# Altium PCB SART-CMSV1.0.PcbDoc
Units mm, origin at the board's own origin, x right, y up, seen from the top; angles counter-clockwise.
Board outline 40 x 40 mm, 4 copper layers (Top Layer, Layer 1, Layer 2, Bottom Layer), stack 1.566 mm thick; 61 components, 31 nets, 151 pads, 126 vias.
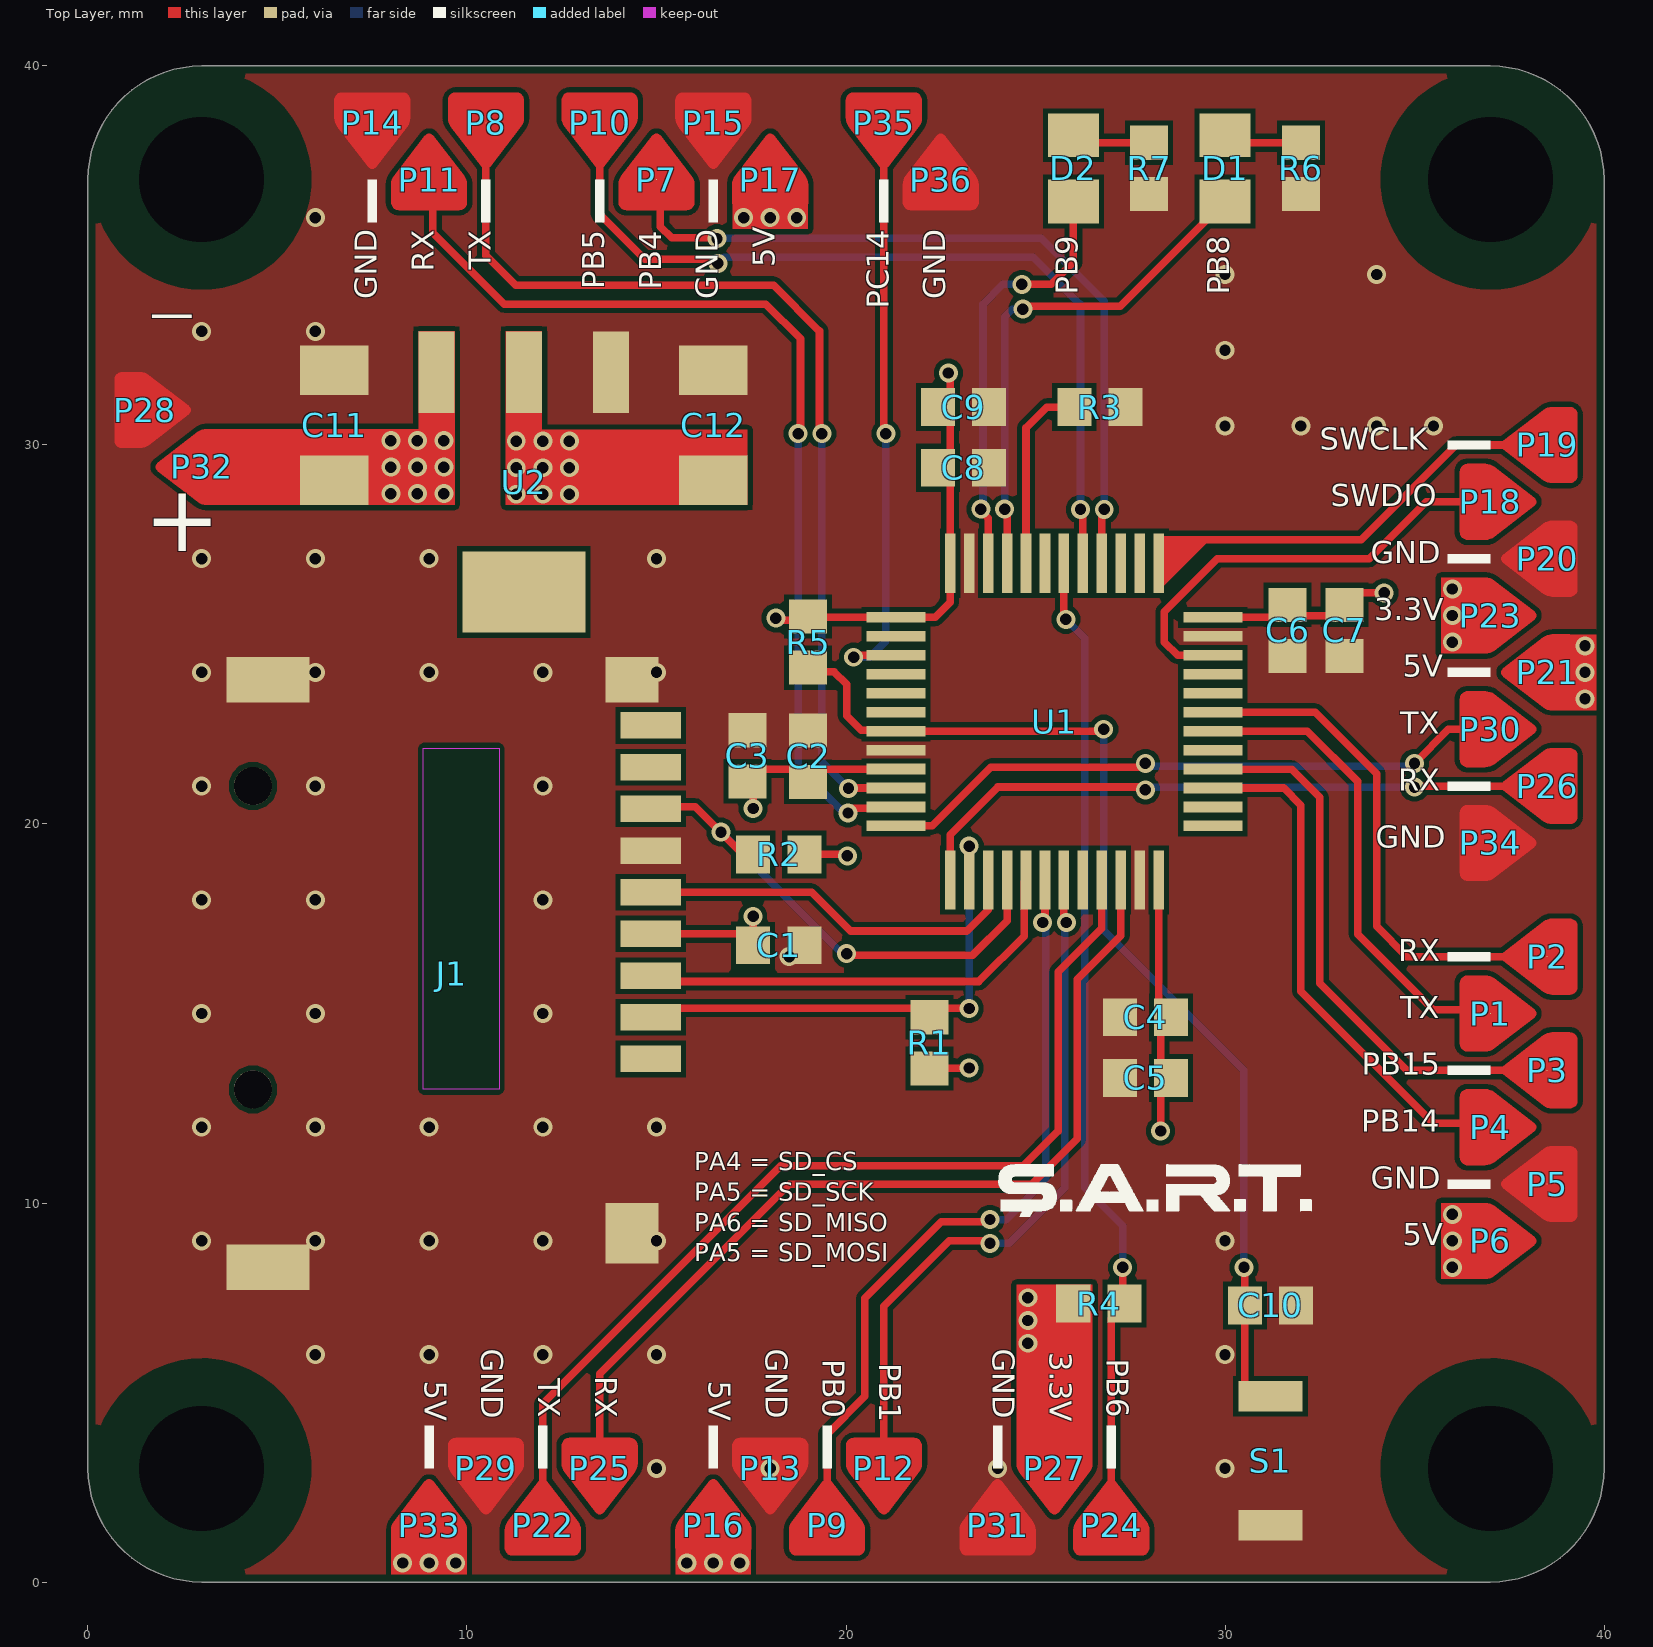
[diagram p0: Top Layer view]
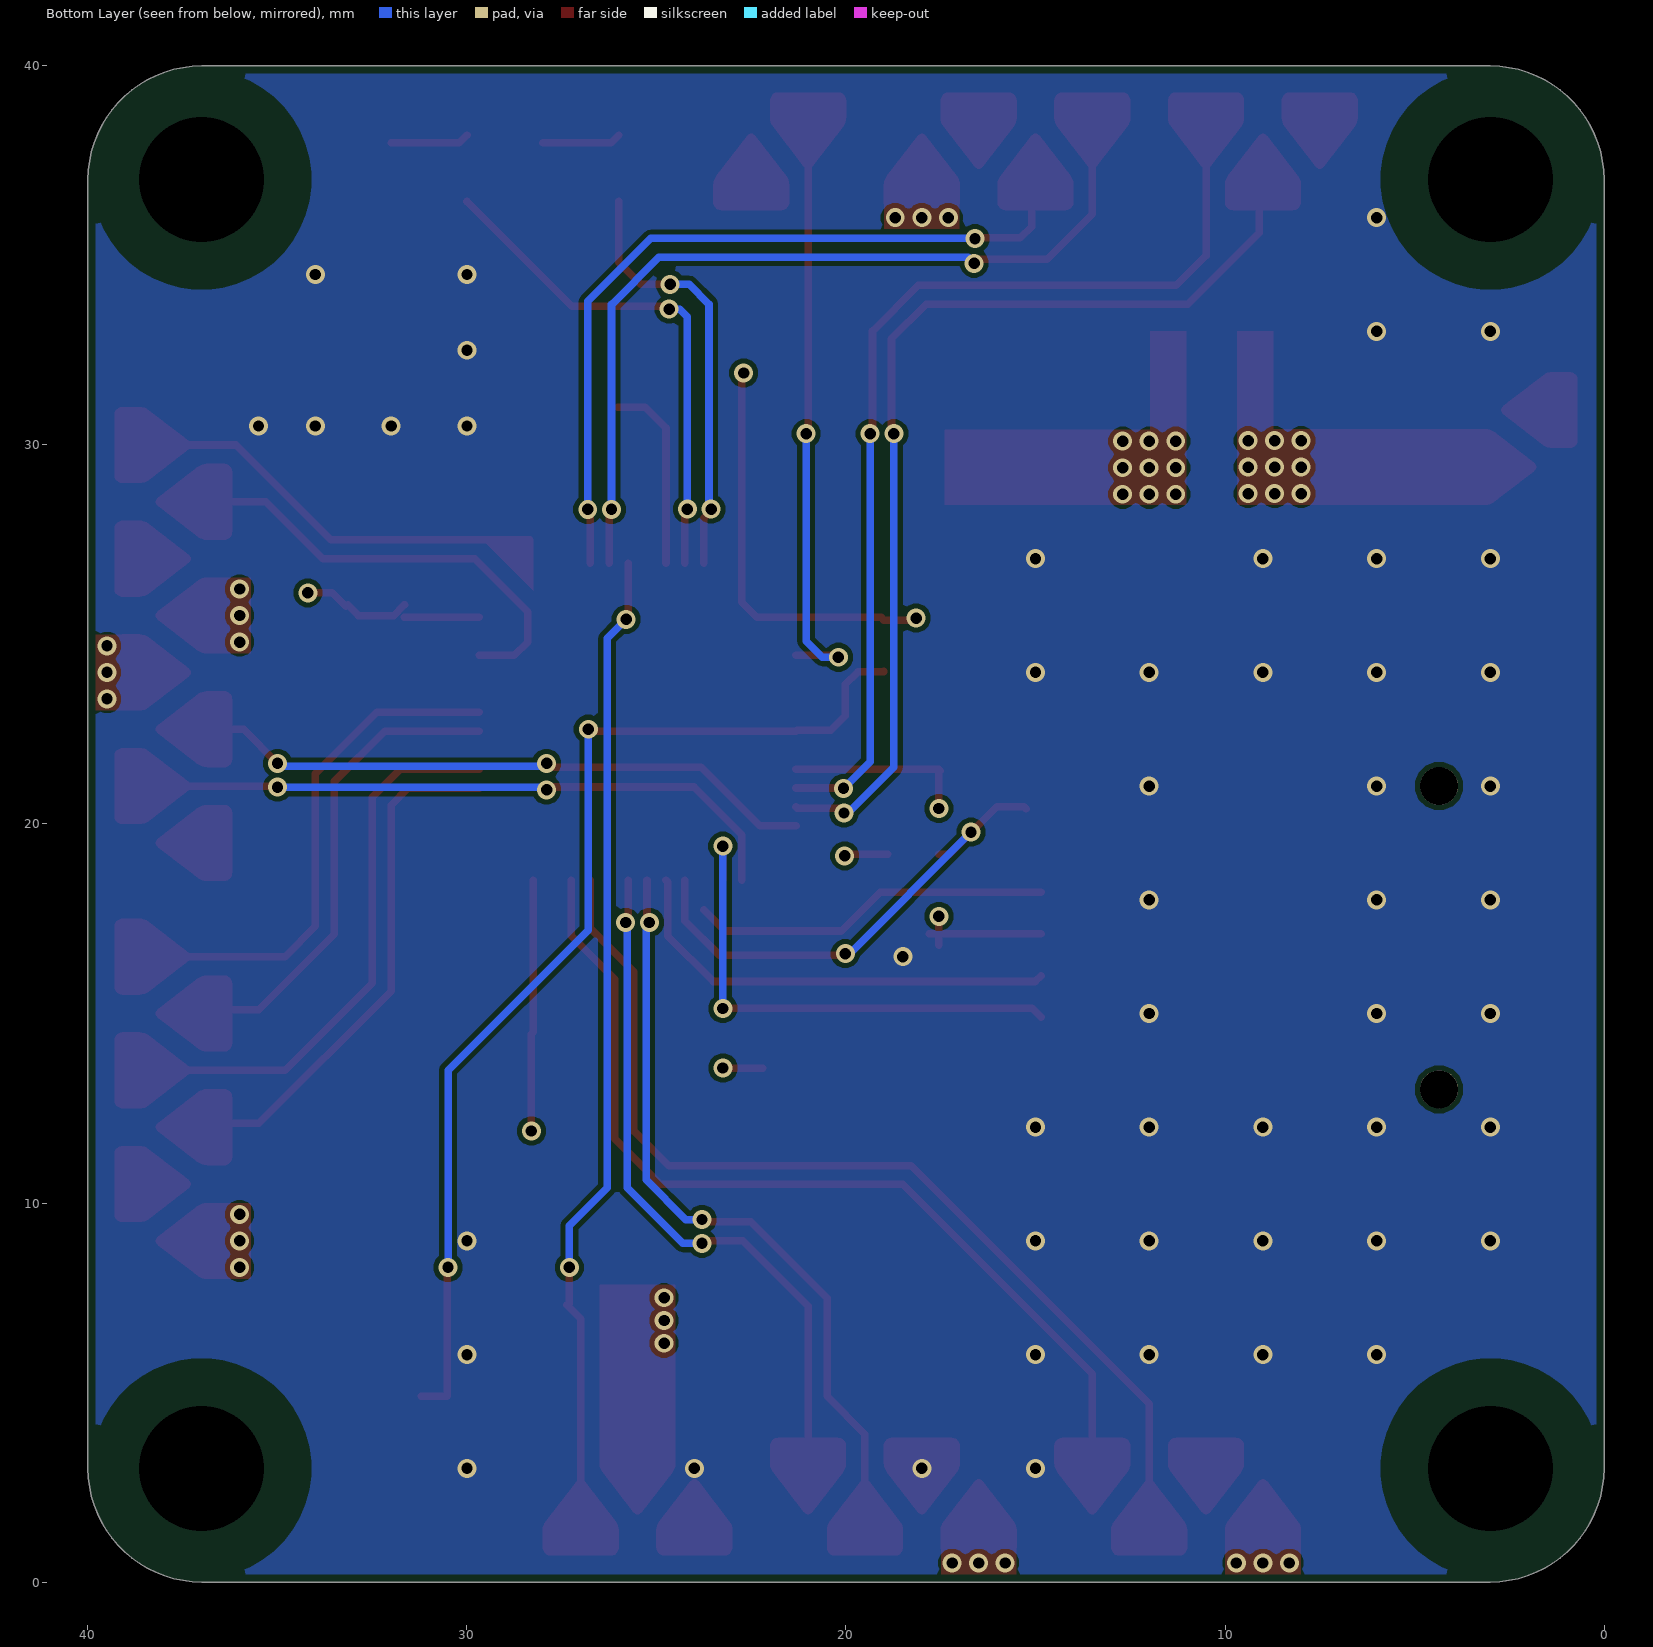
[diagram p1: Bottom Layer view, seen from below]
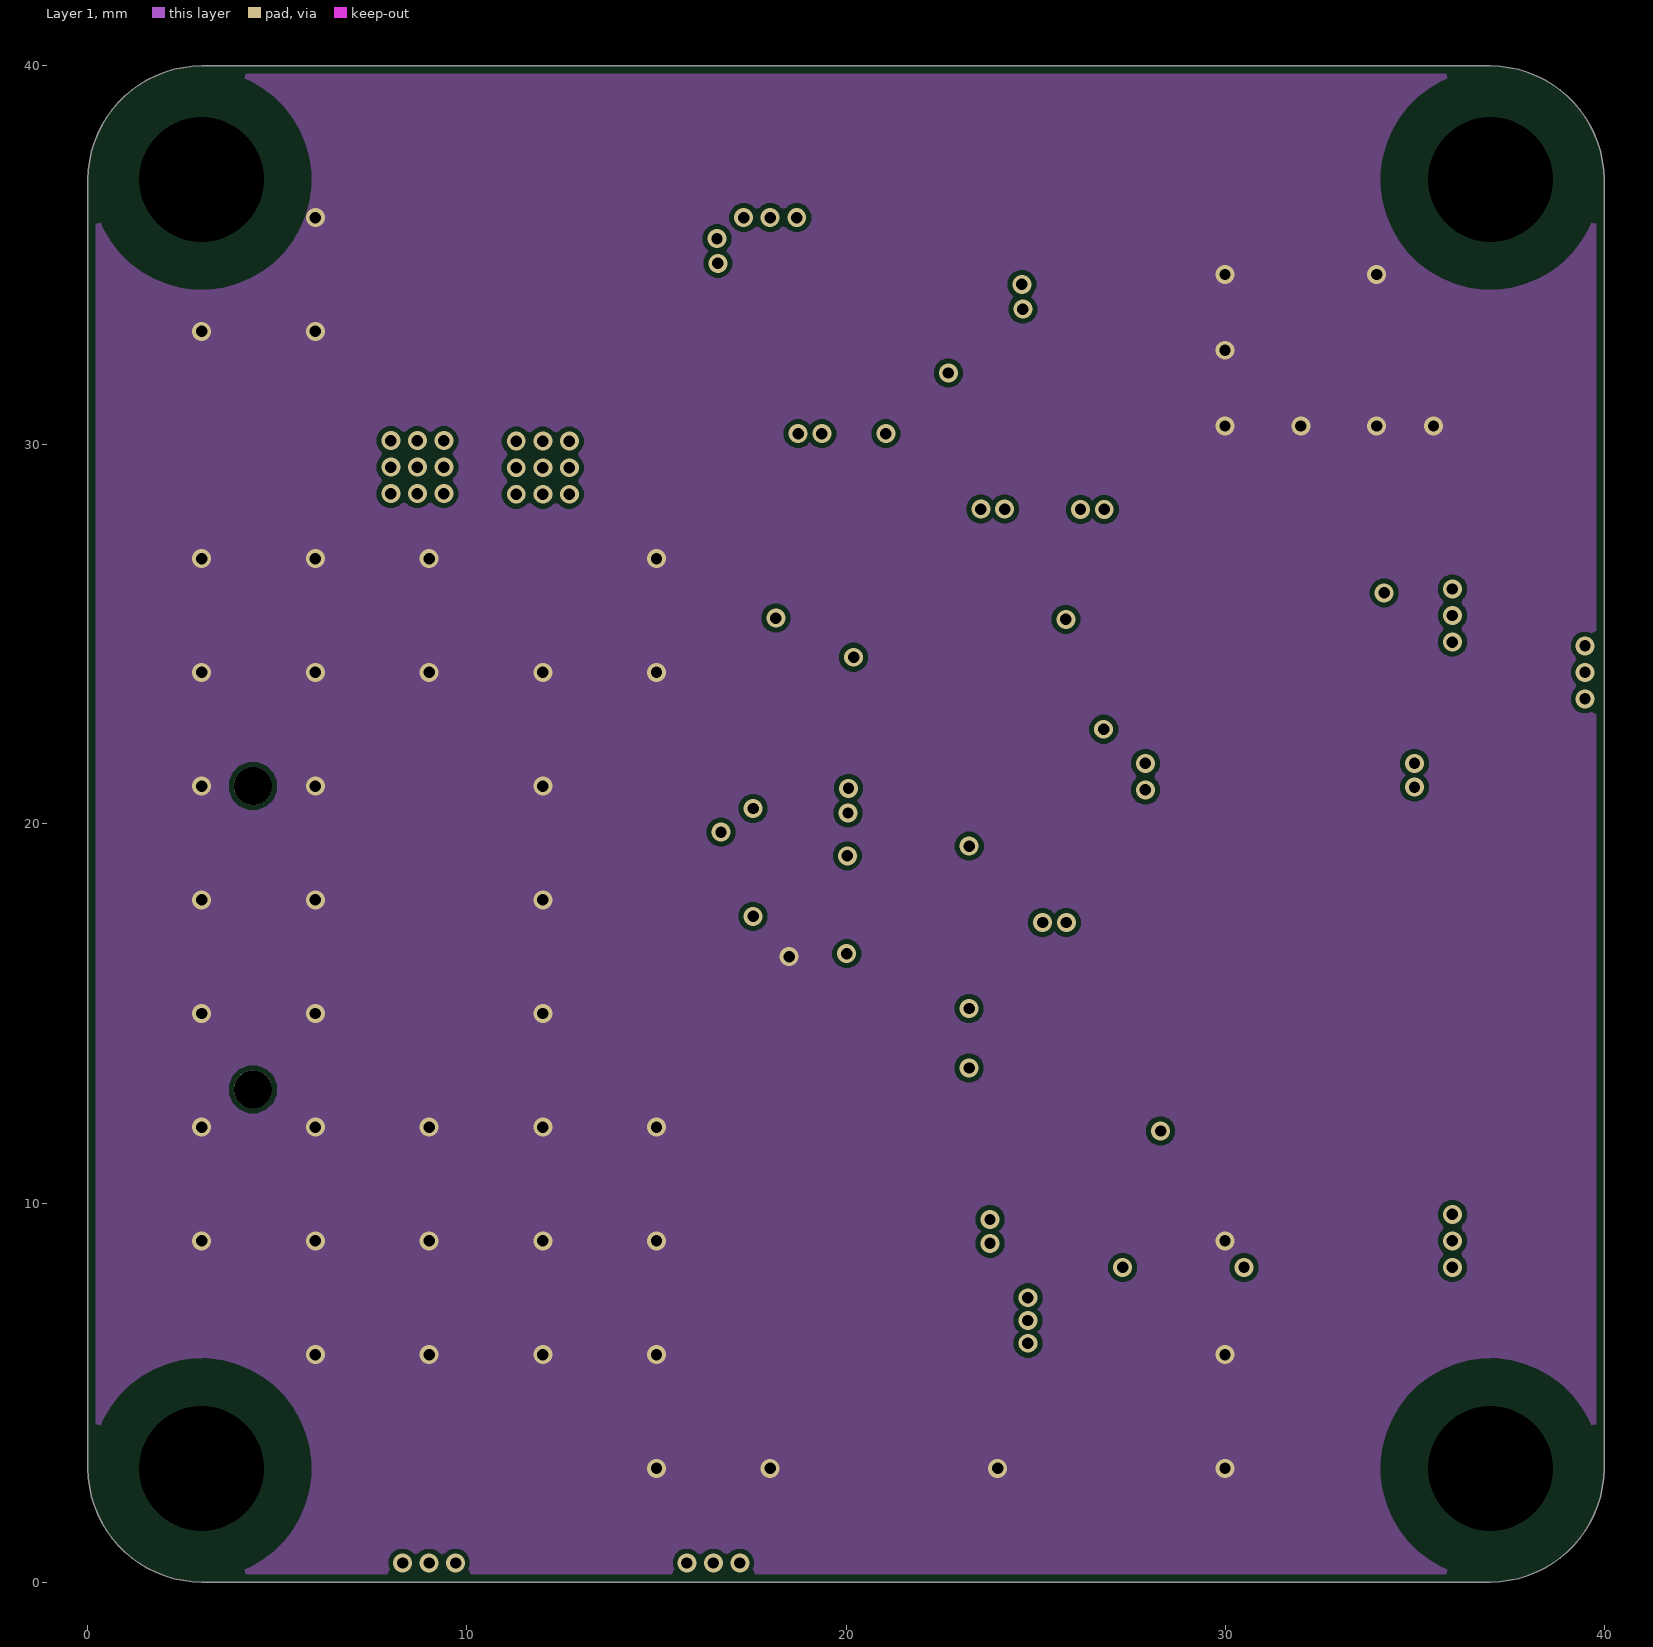
[diagram p2: Layer 1]
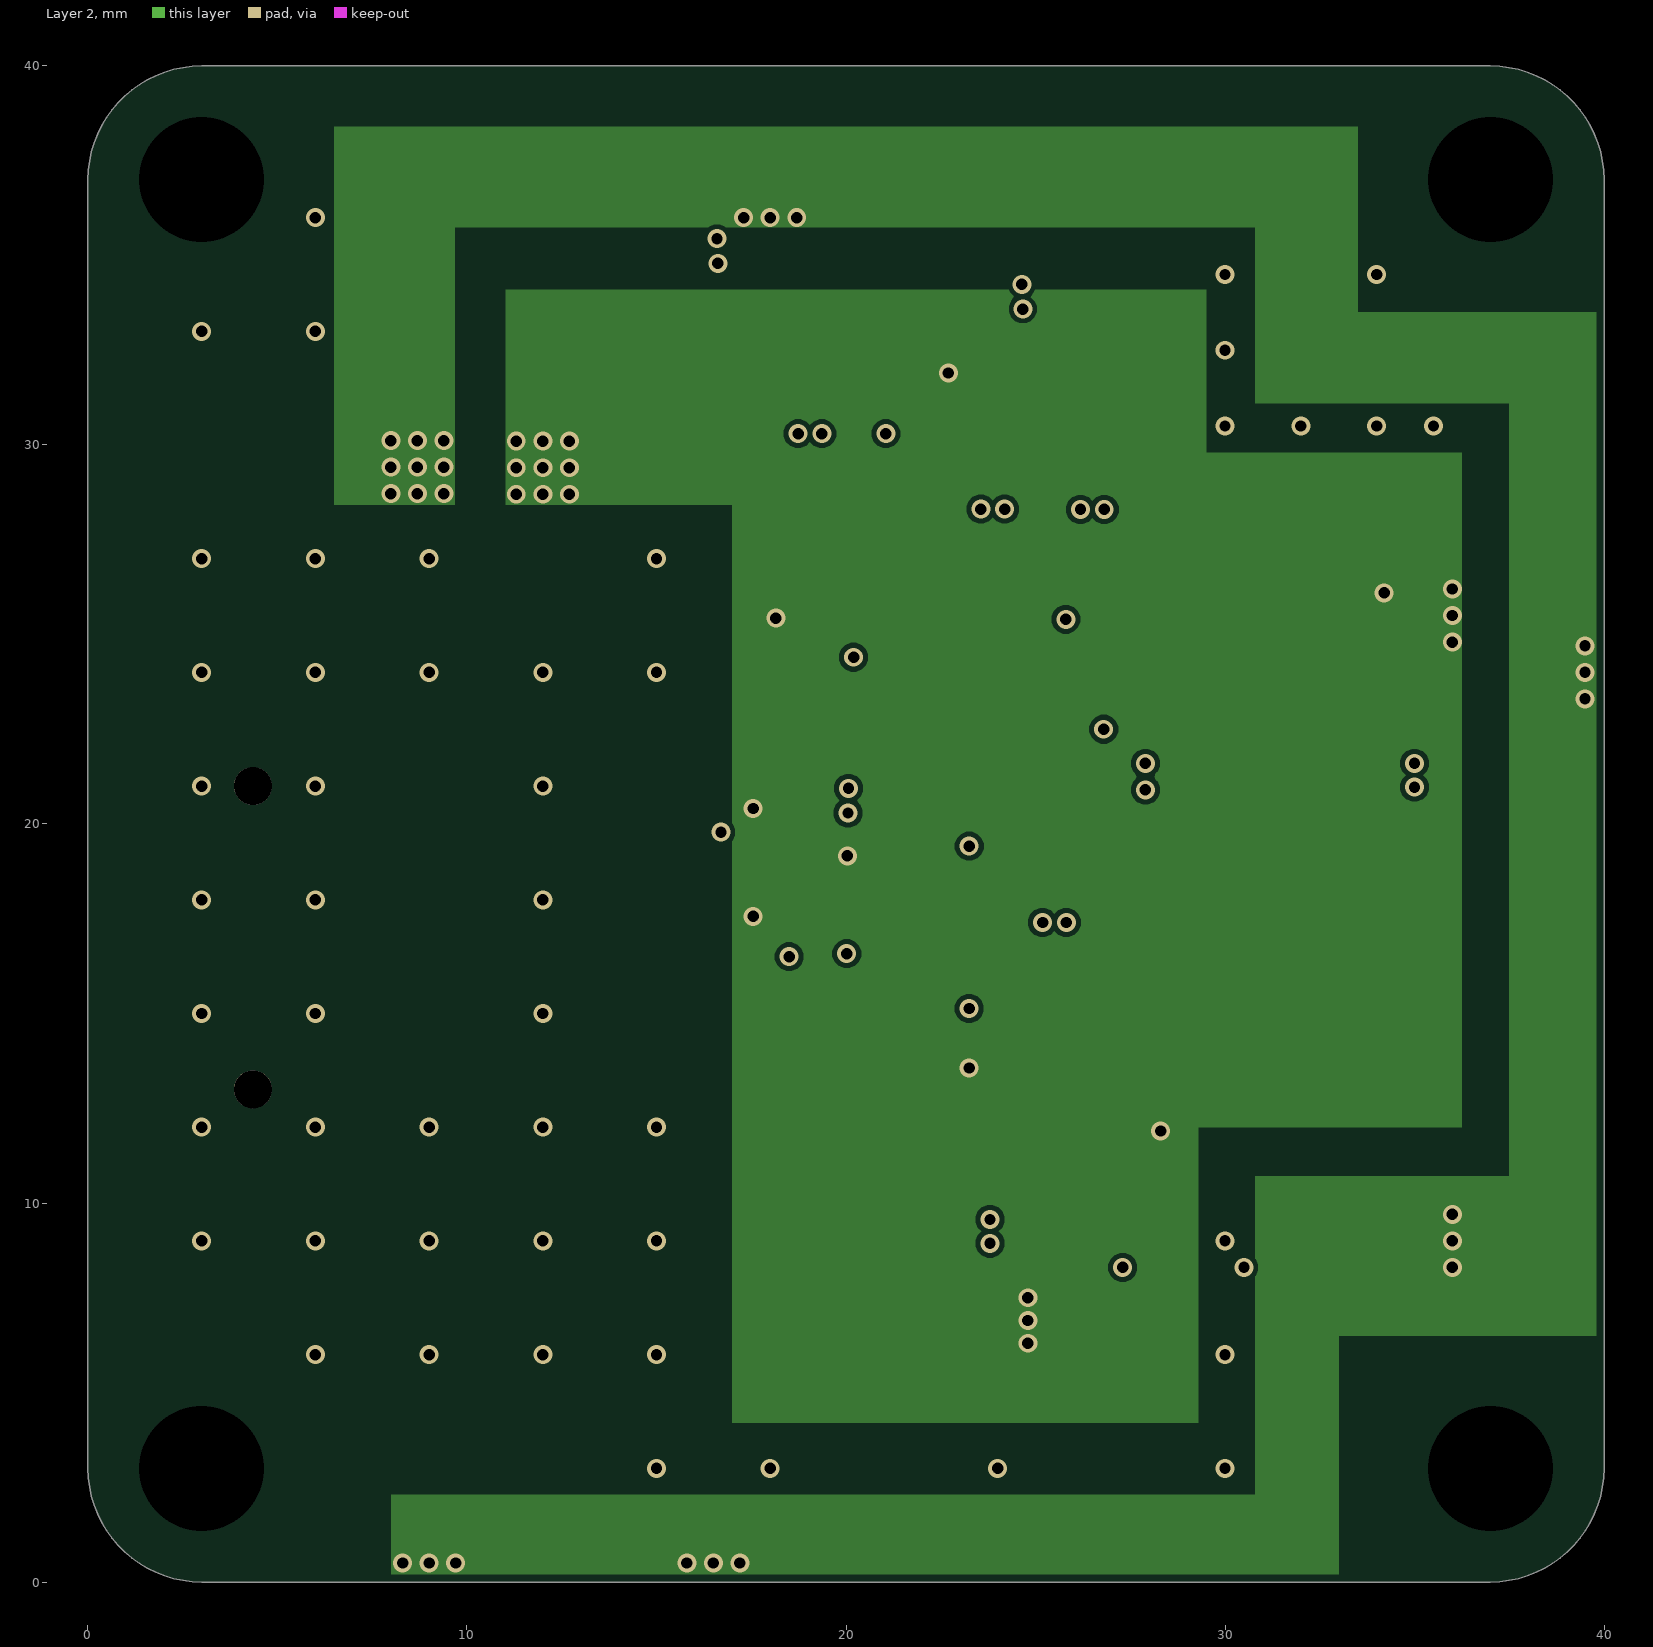
[diagram p3: Layer 2]

## Layer stack, top to bottom
Top Solder: solder mask 0.0305, Solder Resist, Dk 3.5
Top Layer: signal copper 0.035
Dielectric 2: prepreg 0.203, PP-006, Dk 4.1
Layer 1: signal copper 0.03
Dielectric 1: dielectric 1.03, FR-4, Dk 4.8
Layer 2: signal copper 0.03
Dielectric 3: prepreg 0.203, PP-006, Dk 4.1
Bottom Layer: signal copper 0.035
Bottom Solder: solder mask 0.0305, Solder Resist, Dk 3.5

## Board outline
3,0 37,0 ccw(c37,3) 40,3 40,37 ccw(c37,37) 37,40 3,40 ccw(c3,37) 0,37 0,3 ccw(c3,3)

## Design rules (kind name [scope] priority, off if disabled: settings)
BoardOutlineClearance [All] p1: gap=0.2 ignorepadtopadclearanceinfootprint=FALSE
Clearance [All] p1: gap=0.127 ignorepadtopadclearanceinfootprint=FALSE
ComponentClearance [All] p1 off: gap=0.254 collisioncheckmode=3 verticalgap=0 showdistances=FALSE checkcomponentboundary=TRUE
DiffPairsRouting [All] p1: maxlimit=0.3 minlimit=0.3 mostfreqgap=0.3 toplayer_minwidth=0.2 toplayer_maxwidth=0.2 toplayer_prefwidth=0.2 midlayer1_minwidth=0.2 midlayer1_maxwidth=0.2 midlayer1_prefwidth=0.2 midlayer2_minwidth=0.2 midlayer2_maxwidth=0.2 midlayer2_prefwidth=0.2 bottomlayer_minwidth=0.2 bottomlayer_maxwidth=0.2 bottomlayer_prefwidth=0.2 maxuncoupledlength=12.7
PlaneConnect [All] p1: planeconnectstyle=Direct reliefexpansion=0.508 reliefentries=4 reliefconductorwidth=0.254 reliefairgap=0.254
PolygonConnect [All] p1: connectstyle=Direct reliefconductorwidth=0.254 reliefentries=4 polygonreliefangle="90 Angle" airgapwidth=0.254
RoutingVias [All] p1: holewidth=0.3 width=0.5 viastyle="Through Hole" minholewidth=0.3 minwidth=0.5 maxholewidth=0.711 maxwidth=1.27
ShortCircuit [InComponent('*1')or InComponent('*2') or InComponent('*3') vs InComponent('*1')or InComponent('*2') or InComponent('*3')] p1: allowed=TRUE
SilkToSilkClearance [All] p1 off: silktosilkclearance=0.254
SolderMaskExpansion [All] p1: expansion=0.035 istentingtop=FALSE
Width [All] p1: maxlimit=2 minlimit=0.127 preferedwidth=0.2
25 further rules are at their usual default settings.

## Components (designator, comment, footprint, x,y, rotation, side; value= is the part's Value field where it differs from the comment)
C1 "0603, 1uF" "CAP 0603_1608" 18.225,16.8 r180 top
C2 "0603, 0.1uF" "CAP 0603_1608" 19,21.787 r270 top
C3 "0603, 1uF" "CAP 0603_1608" 17.4,21.8 r270 top
C4 "0603, 0.1uF" "CAP 0603_1608" 27.9,14.9 r0 top
C5 "0603, 1uF" "CAP 0603_1608" 27.9,13.3 r0 top
C6 "0603, 0.1uF" "CAP 0603_1608" 31.65,25.108 r90 top
C7 "0603, 1uF" "CAP 0603_1608" 33.15,25.108 r90 top
C8 "0603, 0.1uF" "CAP 0603_1608" 23.1,29.4 r180 top
C9 "0603, 1uF" "CAP 0603_1608" 23.1,31 r180 top
C10 "0603, 0.1uF" "CAP 0603_1608" 31.2,7.3 r180 top
C11 "1206, 10uF" "CAP 1206_3216" 6.5,30.521 r270 top
C12 "1206, 10uF" "CAP 1206_3216" 16.5,30.521 r270 top
D1 "0805 LED Yellow" "LED 0805_2012 YELLOW" 30,37.3 r90 top
D2 "0805 LED Red" "LED 0805_2012 RED" 26,37.3 r90 top
J1 "L-KLS1-TF-003-H1.85-R" L-KLS1-TF-003-H1.85-R 8,16.05 r270 top
P1 "Pad1" PAD 37,15 r270 top
P2 "Pad0" PAD 38.5,16.5 r90 top
P3 "Pad1" PAD 38.5,13.5 r90 top
P4 "Pad0" PAD 37,12 r270 top
P5 "Pad1" PAD 38.5,10.5 r90 top
P6 "Pad0" PAD 37,9 r270 top
P7 "Pad1" PAD 15,37 r0 top
P8 "Pad1" PAD 10.5,38.5 r180 top
P9 "Pad1" PAD 19.5,1.5 r0 top
P10 "Pad0" PAD 13.5,38.5 r180 top
P11 "Pad0" PAD 9,37 r0 top
P12 "Pad0" PAD 21,3 r180 top
P13 "Pad1" PAD 18,3 r180 top
P14 "Pad1" PAD 7.5,38.5 r180 top
P15 "Pad1" PAD 16.5,38.5 r180 top
P16 "Pad0" PAD 16.5,1.5 r0 top
P17 "Pad0" PAD 18,37 r0 top
P18 "Pad1" PAD 37,28.5 r270 top
P19 "Pad0" PAD 38.5,30 r90 top
P20 "Pad1" PAD 38.5,27 r90 top
P21 "Pad0" PAD 38.5,24 r90 top
P22 "Pad1" PAD 12,1.5 r0 top
P23 "Pad1" PAD 37,25.5 r270 top
P24 "Pad1" PAD 27,1.5 r0 top
P25 "Pad0" PAD 13.5,3 r180 top
P26 "Pad0" PAD 38.5,21 r90 top
P27 "Pad0" PAD 25.5,3 r180 top
P28 "Pad1" PAD 1.5,30.921 r270 top
P29 "Pad1" PAD 10.5,3 r180 top
P30 "Pad1" PAD 37,22.5 r270 top
P31 "Pad1" PAD 24,1.5 r0 top
P32 "Pad0" PAD 3,29.421 r90 top
P33 "Pad0" PAD 9,1.5 r0 top
P34 "Pad0" PAD 37,19.5 r270 top
P35 "Pad1" PAD 21,38.5 r180 top
P36 "Pad0" PAD 22.5,37 r0 top
R1 "0603, 10K" "RES 0603_1608" 22.2,14.225 r90 top
R2 "0603, 10K" "RES 0603_1608" 18.225,19.2 r180 top
R3 "0603, 10K" "RES 0603_1608" 26.7,31 r0 top
R4 "0603, 4.7K" "RES 0603_1608" 26.671,7.346 r0 top
R5 "0603, 10K" "RES 0603_1608" 19,24.8 r270 top
R6 "0603, 2.2K" "RES 0603_1608" 32,37.3 r90 top
R7 "0603, 2.2K" "RES 0603_1608" 28,37.3 r90 top
S1 "B3U-1000P" B3U-1000P 31.2,3.2 r270 top
U1 "STM32F072C8T6" STM32F072C8T6 25.5,22.7 r0 top
U2 "TLV1117-33IDCYR" SOT230P700X180-4N 11.5,29.021 r270 top

## Footprints (in the part's own frame and the unit in brackets; to place one, negate y for a bottom-side part, rotate by r counter-clockwise, add the part's x,y. Pads: shape width x height; smd on the part's side, far side on the other; paste and mask are expansions set on the pad)
B3U-1000P [mm]
  rect 0.8x1.7 smd: 1(-1.7,0) 2(1.7,0)
  body extent -2,-1.25 2,1.25, height 1.75
"CAP 0603_1608" [mm] "Chip Capacitor, 2-Leads, Body 1.60x0.80mm, IPC Medium Density"
  rect 0.9x1 smd: 1(-0.675,0) 2(0.675,0)
  body extent -0.8,-0.41 0.8,0.41, height 0.82
"CAP 1206_3216" [mm] "Chip Capacitor, 2-Leads, Body 3.25x1.60mm, IPC Medium Density"
  rect 1.3x1.8 smd: 1(-1.45,0) 2(1.45,0)
  body extent -1.6,-0.81 1.6,0.81, height 1.62
L-KLS1-TF-003-H1.85-R [mm]
  rect 0.7x1.6 smd: 1(2.25,6.85) 2(1.15,6.85) 3(0.05,6.85) 4(-1.05,6.85) 5(-2.15,6.85) 6(-3.25,6.85) 7(-4.35,6.85) 8(-5.45,6.85) 9(-6.55,6.85)
  rect 1.2x1.4 smd: 6(-7.75,6.35)
  rect 1.2x2.2 smd: 6(-7.75,-3.25) 6(7.75,-3.25)
  rect 1.6x1.4 smd: 6(6.85,6.35)
  round 1 hole 1 unplated: ""(-4.95,-3.65) ""(3.05,-3.65)
  Top Layer keep-out region: -5.95,2.85 3.05,2.85 3.05,0.85 -5.95,0.85
  body extent -8.05,-9.85 8.05,7.35, height 1.9
"LED 0805_2012 RED" [mm] "Chip Diode, 2-Leads, Body 2.00x1.25mm, IPC Medium Density"
  rect 1.15x1.35 smd: 1(-0.875,0) 2(0.875,0)
  body extent -1,-0.63 1,0.63, height 0.91
"LED 0805_2012 YELLOW" [mm] "Chip Diode, 2-Leads, Body 2.00x1.25mm, IPC Medium Density"
  rect 1.15x1.35 smd: 1(-0.875,0) 2(0.875,0)
  body extent -1,-0.63 1,0.63, height 0.91
PAD [mil]
  round 1 smd: 1(0,0)
  Top Layer region: -39.37,-23.78 -39.37,-4.87 -38.61,-0.26 -36.4,3.86 -36.4,3.86 -4.29,45.6 -2.39,47.16 0,47.71 2.39,47.16 4.29,45.6 4.29,45.6 36.32,3.97 38.59,-0.27 39.37,-5.01 39.37,-5.01 39.37,-23.64 38.77,-26.65 37.07,-29.2 34.52,-30.9 31.52,-31.5 31.52,-31.5 -31.66,-31.5 -34.61,-30.91 -37.11,-29.24 -38.78,-26.73 -39.37,-23.78
"RES 0603_1608" [mm] "Chip Resistor, 2-Leads, Body 1.60x0.80mm, IPC Medium Density"
  rect 0.9x1 smd: 1(-0.675,0) 2(0.675,0)
  body extent -0.8,-0.4 0.8,0.4, height 0.45
SOT230P700X180-4N [mm]
  rect 2.15x0.95 smd: 1(-2.9,2.3) 2(-2.9,0) 3(-2.9,-2.3)
  rect 2.15x3.25 smd: 2(2.9,0)
  body extent -3.5,-3.25 3.5,3.25, height 1.81
STM32F072C8T6 [mm]
  rect 1.56x0.28 smd: 1(-4.18,2.75) 2(-4.18,2.25) 3(-4.18,1.75) 4(-4.18,1.25) 5(-4.18,0.75) 6(-4.18,0.25) 7(-4.18,-0.25) 8(-4.18,-0.75) 9(-4.18,-1.25) 10(-4.18,-1.75) 11(-4.18,-2.25) 12(-4.18,-2.75) 25(4.18,-2.75) 26(4.18,-2.25) 27(4.18,-1.75) 28(4.18,-1.25) 29(4.18,-0.75) 30(4.18,-0.25) 31(4.18,0.25) 32(4.18,0.75) 33(4.18,1.25) 34(4.18,1.75) 35(4.18,2.25) 36(4.18,2.75)
  rect 0.28x1.56 smd: 13(-2.75,-4.18) 14(-2.25,-4.18) 15(-1.75,-4.18) 16(-1.25,-4.18) 17(-0.75,-4.18) 18(-0.25,-4.18) 19(0.25,-4.18) 20(0.75,-4.18) 21(1.25,-4.18) 22(1.75,-4.18) 23(2.25,-4.18) 24(2.75,-4.18) 37(2.75,4.18) 38(2.25,4.18) 39(1.75,4.18) 40(1.25,4.18) 41(0.75,4.18) 42(0.25,4.18) 43(-0.25,4.18) 44(-0.75,4.18) 45(-1.25,4.18) 46(-1.75,4.18) 47(-2.25,4.18) 48(-2.75,4.18)
  body extent -4.5,-4.5 4.5,4.5, height 1.61

## Part data
C1 C2 C3 C4 C5 C6 C7 C8 C9 C10: library part "0603 Kapasitör"
C11 C12: library part "1206 Kapasitör"
R1 R2 R3 R4 R5 R6 R7: library part "0603 Direnç"

## Free pads (board coordinates)
  round 0 hole 3.3 unplated mask+1.25: 55(3,3) 55(3,37) 55(37,3) 55(37,37)

## Via types
v1: diameter 0.5, hole 0.3, Top Layer to Bottom Layer, tented both sides, 126 vias

## Nets (pads, with @x,y where several pads share a name; then routed paths per layer and width w, separated by ;. In a path a pad name is that pad's centre, name@x,y a point inside that pad or via, vN(x,y) a via of type N, cw(c..) or ccw(c..) an arc to the next point about the centre after c; other vN are vias at no path point)
3.3V: C1.2 C2.2 C3.2 C4.2 C5.2 C6.2 C7.2 C8.2 C9.2 C12.2 J1.4 P23.1 P27.1 R1.1 R2.1 R4.1 R5.1 U1.1 U1.9 U1.24 U1.36 U1.48 U2.2@11.5,31.921 | length 33.2
  Top Layer w0.2: J1.4 C1.2@17.8,17.1 ; v1(17.548,17.564) C1.2 C1.2 ; v1(17.55,20.408) 17.55,21.366 17.508,21.408 17.55,21.45 U1.9 ; v1(18.15,25.433) 18.208,25.375 19,25.375 19.075,25.45 U1.1 22.35,25.45 22.75,25.85 U1.48 22.75,31.85 v1(22.7,31.9) ; R2.1 19.994,19.2 v1(20.034,19.16) ; R1.1 23.235,13.55 v1(23.248,13.563) ; U1.24 28.25,15.792 28.25,14.5 28.3,14.45 v1(28.3,11.9) ; U1.36 C6.2@31.65,25.45 ; C6.2 31.938,25.495 32.862,25.495 C7.2 ; C7.2@33.2,25.741 33.559,26.1 v1(34.2,26.1)
  other v1: 24.8,6.3 24.8,6.9 24.8,7.5 36,24.8 36,25.5 36,26.2 11.3,28.7 12,28.7 12.7,28.7 11.3,29.4 12,29.4 12.7,29.4 11.3,30.1 12,30.1 12.7,30.1
5V: C11.2 P6.1 P16.1 P17.1 P21.1 P32.1 P33.1 U2.3
  other v1: 8.3,0.5 9,0.5 9.7,0.5 15.8,0.5 16.5,0.5 17.2,0.5 36,8.3 36,9 36,9.7 39.5,23.3 39.5,24 39.5,24.7 7.989,28.715 8.689,28.715 9.389,28.715 7.989,29.415 8.689,29.415 9.389,29.415 7.989,30.115 8.689,30.115 9.389,30.115 17.3,36 18,36 18.7,36
ADC_IN8: P9.1 U1.18 | length 20.4
  Top Layer w0.2: P9.1 19.5,3.9 20.5,4.9 20.5,7.481 22.519,9.5 23.737,9.5 v1(23.8,9.564) ; v1(25.187,17.4) 25.25,17.464 U1.18
  Bottom Layer w0.2: v1(23.8,9.564) 24.225,9.564 25.274,10.613 25.274,17.313 v1(25.187,17.4)
ADC_IN9: P12.1 U1.19 | length 18.6
  Top Layer w0.2: P12.1 21,5.8 21,7.274 22.726,9 23.737,9 v1(23.8,8.937) ; U1.19 25.75,17.464 v1(25.813,17.4)
  Bottom Layer w0.2: v1(23.8,8.937) 24.305,8.937 25.774,10.406 25.774,17.36 v1(25.813,17.4)
GND: C1.1 C2.1 C3.1 C4.1 C5.1 C6.1 C7.1 C8.1 C9.1 C10.1 C11.1 C12.1 J1.6 P5.1 P13.1 P14.1 P15.1 P20.1 P28.1 P29.1 P31.1 P34.1 P36.1 R3.2 R6.1 R7.1 S1.2 U1.8 U1.23 U1.35 U1.47 U2.1
  other v1: 15,3 18,3 24,3 30,3 6,6 9,6 12,6 15,6 30,6 3,9 6,9 9,9 12,9 15,9 30,9 3,12 6,12 9,12 12,12 15,12 3,15 6,15 12,15 18.5,16.5 3,18 6,18 12,18 3,21 6,21 12,21 3,24 6,24 9,24 12,24 15,24 3,27 6,27 9,27 15,27 30,30.5 32,30.5 34,30.5 35.5,30.5 30,32.5 3,33 6,33 30,34.5 34,34.5 6,36
LoRa_M0: P3.1 U1.28 | length 15
  Top Layer w0.2: U1.28 31.757,21.45 32.5,20.707 32.5,15.8 34.8,13.5 P3.1
LoRa_M1: P4.1 U1.27 | length 13.9
  Top Layer w0.2: U1.27 31.55,20.95 32,20.5 32,15.593 35.493,12.1 36.9,12.1 P4.1
LoRa_RX: P2.1 U1.31 | length 13.9
  Top Layer w0.2: U1.31 32.378,22.95 34,21.328 34,17.3 34.8,16.5 P2.1
LoRa_TX: P1.1 U1.30 | length 12.8
  Top Layer w0.2: U1.30 32.171,22.45 33.5,21.121 33.5,17.093 35.493,15.1 36.9,15.1 P1.1
NetC10_2: C10.2 R5.2 S1.1 U1.7 | length 28.8
  Top Layer w0.2: R5.2@19,24.025 19.008,24.017 19.683,24.017 20.018,23.682 20.018,22.855 20.4,22.474 21.296,22.474 U1.7 26.75,22.45 v1(26.8,22.5) ; v1(30.5,8.3) 30.525,8.275 30.525,6.5 30.525,4.9 S1.1
  Bottom Layer w0.2: v1(26.8,22.5) 26.8,17.2 30.5,13.5 v1(30.5,8.3)
NetD1_2: D1.2 R6.2 | length 2.1
  Top Layer w0.2: D1.2 30.2,37.975 R6.2
NetD2_2: D2.2 R7.2 | length 2.1
  Top Layer w0.2: D2.2 26.2,37.975 R7.2
NetR3_1: R3.1 U1.44 | length 5.1
  Top Layer w0.2: U1.44 24.75,27.762 24.75,28.238 24.75,30.45 25.3,31 R3.1
Nextion_RX: P25.1 U1.22 | length 25
  Top Layer w0.2: P25.1 13.5,4.106 13.5,5.493 18.507,10.5 24.907,10.5 26.1,11.693 26.1,15.9 27.25,17.05 U1.22
Nextion_TX: P22.1 U1.21 | length 26.9
  Top Layer w0.2: P22.1 12,4.7 18.282,10.982 24.682,10.982 25.6,11.9 25.6,16.106 26.75,17.256 U1.21
PB4: P7.1 U1.40 | length 20.8
  Top Layer w0.2: P7.1 15.1,36.9 15.1,35.763 15.398,35.465 16.574,35.465 v1(16.596,35.444) ; U1.40 26.75,28.236 v1(26.813,28.3)
  Bottom Layer w0.2: v1(16.596,35.444) 16.607,35.454 25.146,35.454 26.813,33.787 v1(26.813,28.3)
PB5: P10.1 U1.41 | length 23.1
  Top Layer w0.2: P10.1 13.5,36.093 14.687,34.906 16.507,34.906 v1(16.62,34.793) ; v1(26.187,28.3) 26.25,28.236 U1.41
  Bottom Layer w0.2: v1(16.62,34.793) 16.781,34.954 24.938,34.954 26.187,33.706 v1(26.187,28.3)
PB6: P24.1 R4.2 U1.42 | length 26.2
  Top Layer w0.2: U1.42 25.75,25.45 v1(25.8,25.4) ; P24.1 27,5 27,6.95 R4.2@27.371,7.321 ; R4.2@27.3,7.346 v1@27.3,8.254 ; v1(27.3,8.3) v1@27.346,8.254
  Bottom Layer w0.2: v1(25.8,25.4) 26.3,24.9 26.3,10.4 27.3,9.4 v1(27.3,8.3)
PB8: D1.1 U1.45 | length 13.6
  Top Layer w0.2: v1(24.186,28.308) 24.25,28.245 U1.45 ; v1(24.667,33.585) 24.74,33.657 27.232,33.657 D1.1
  Bottom Layer w0.2: v1(24.186,28.308) 24.186,33.386 24.385,33.585 v1(24.667,33.585)
PB9: D2.1 U1.46 | length 11.4
  Top Layer w0.2: v1(23.559,28.308) 23.559,28.252 23.75,28.061 U1.46 ; v1(24.641,34.238) 25.42,34.238 26,34.819 D2.1
  Bottom Layer w0.2: v1(23.559,28.308) 23.615,28.364 23.615,33.715 24.138,34.238 v1(24.641,34.238)
PC14: P35.1 U1.3 | length 16
  Top Layer w0.2: v1(20.2,24.4) 20.25,24.45 U1.3 ; P35.1 21,30.35 v1(21.05,30.3)
  Bottom Layer w0.2: v1(20.2,24.4) 20.63,24.4 21.05,24.82 v1(21.05,30.3) v1@21.05,30.4
SD_CS: J1.2 R1.2 U1.14 | length 13.7
  Top Layer w0.2: J1.2 15.091,15.141 22.2,15.141 22.208,15.133 v1(23.249,15.133) ; U1.14 23.25,19.35 23.3,19.4 23.267,19.4 v1(23.251,19.416)
  Bottom Layer w0.2: v1(23.249,15.133) 23.251,15.136 v1(23.251,19.416)
SD_MISO: J1.7 R2.2 U1.16 | length 13.2
  Top Layer w0.2: J1.7@15.25,20.4 15.302,20.452 16.022,20.452 17.274,19.2 R2.2 ; v1@16.697,19.778 v1(16.702,19.784) ; v1(20.019,16.578) 20.059,16.538 23.338,16.538 24.25,17.45 U1.16
  Bottom Layer w0.2: v1(16.702,19.784) 16.702,19.781 19.945,16.538 19.979,16.538 v1(20.019,16.578)
SD_MOSI: J1.3 U1.17 | length 11.9
  Top Layer w0.2: J1.3 15.005,15.845 23.507,15.845 24.7,17.037 24.7,18.47 U1.17
SD_SCK: J1.5 U1.15 | length 9.6
  Top Layer w0.2: J1.5 19.1,18.2 20.124,17.176 23.186,17.176 23.75,17.74
Serial_RX: P26.1 U1.13 | length 17.5
  Top Layer w0.2: U1.13 22.75,19.719 24.007,20.976 27.824,20.976 v1(27.9,20.9) ; v1(35,20.973) 35.027,21 37.394,21 P26.1
  Bottom Layer w0.2: v1(27.9,20.9) 27.966,20.966 v1@34.993,20.966
Serial_TX: P30.1 U1.12 | length 16.8
  Top Layer w0.2: U1.12 22.274,19.95 23.825,21.501 27.801,21.501 v1(27.9,21.6) ; v1(35,21.6) 35,21.606 35.894,22.5 P30.1
  Bottom Layer w0.2: v1(27.9,21.6) 27.98,21.52 34.92,21.52 v1(35,21.6)
SWCLK: P19.1 U1.37 | length 11.2
  Top Layer w0.2: U1.37@28.349,27.5 33.6,27.5 36.1,30 P19.1
SWDIO: P18.1 U1.34 | length 12
  Top Layer w0.2: U1.34 28.75,24.45 28.4,24.8 28.4,25.6 29.8,27 33.807,27 35.307,28.5 P18.1
VESC_RX: P11.1 U1.11 | length 26.8
  Top Layer w0.2: P11.1 9.1,36.9 9.1,35.6 10.983,33.717 17.883,33.717 18.8,32.8 18.8,30.364 v1(18.737,30.3) ; v1(20.052,20.29) 20.052,20.309 20.162,20.42 21.29,20.42 U1.11
  Bottom Layer w0.2: v1(18.737,30.3) 18.737,21.495 19.941,20.29 v1(20.052,20.29)
VESC_TX: P8.1 U1.10 | length 26.8
  Top Layer w0.2: P8.1 10.5,35 11.283,34.217 18.09,34.217 19.3,33.007 19.3,30.364 v1(19.364,30.3) ; v1(20.066,20.942) 20.074,20.95 U1.10
  Bottom Layer w0.2: v1(19.364,30.3) 19.364,21.644 v1(20.066,20.942)
pads on no net: J1. J1.1 J1.8 J1.9 U1.2 U1.4 U1.5 U1.6 U1.20 U1.25 U1.26 U1.29 U1.32 U1.33 U1.38 U1.39 U1.43 U2.2@11.5,26.121

## Polygon pours and split planes (outlines as drawn)
3.3V on Layer 2 "NONET_L-01_P-001" (solid, pour order 1): 11.025,28.421 11.025,34.1 29.5,34.1 29.5,29.8 36.251,29.8 36.251,12.002 29.3,12.002 29.3,4.2 17,4.2 17,28.421
5V on Layer 2 "NONET_L-01_P-001" (solid, pour order 0): 6.5,28.421 9.675,28.421 9.675,32.3 9.675,35.744 30.8,35.744 30.8,31.1 37.5,31.1 37.5,10.7 30.8,10.7 30.8,2.3 8,2.3 8,0.2 33,0.2 33,6.5 39.8,6.5 39.8,33.5 33.5,33.5 33.5,38.4 6.5,38.4
GND on Top Layer "NONET_L-01_P-001" (solid, pour order 3): 0,40 0,0 40,0 40,40
GND on Layer 1 "NONET_L-01_P-001" (solid, pour order 2): 0,40 0,0 40,0 40,40
GND on Bottom Layer "NONET_L-01_P-001" (solid, pour order 5): 0,40 0,0 40,0 40,40

## Other copper
Top Layer:
  region net 3.3V: 36.636,26.5 35.7,26.5 35.7,24.5 36.636,24.5
  region net 5V: 17,36.636 17,35.7 19,35.7 19,36.636
  region net 5V: 15.5,1.136 15.5,0.2 17.5,0.2 17.5,1.136
  region net 5V: 8,1.136 8,0.2 10,0.2 10,1.136
  region net 5V: 36.636,10 35.7,10 35.7,8 36.636,8
  rectangle net 5V: 38.864,23 39.8,25
  region net SWCLK: 29.6,27.5 28.25,27.5 28.25,26.15
  region net 3.3V: 26.5,3.364 26.5,7.846 24.5,7.846 24.5,3.364
  region net 3.3V: 11.025,32.996 11.025,28.421 17.4,28.421 17.4,30.396 11.975,30.396 11.975,32.996
  region net 5V: 3.364,28.421 9.675,28.421 9.675,32.996 8.725,32.996 8.725,30.421 3.364,30.421
Multi-Layer:
  pour cut-out: 37,39.9 cw(c37,37) 39.9,37 cw(c37,37) 37,34.1 cw(c37,37) 34.1,37 cw(c37,37)
  pour cut-out: 3,39.9 cw(c3,37) 5.9,37 cw(c3,37) 3,34.1 cw(c3,37) 0.1,37 cw(c3,37)
  pour cut-out: 3,5.9 cw(c3,3) 5.9,3 cw(c3,3) 3,0.1 cw(c3,3) 0.1,3 cw(c3,3)
  pour cut-out: 37,5.9 cw(c37,3) 39.9,3 cw(c37,3) 37,0.1 cw(c37,3) 34.1,3 cw(c37,3)

## Silkscreen, mask and mechanical layers (free items; w line width, h text height)
Top Overlay:
  drawing of 27 lines, arcs and shapes, not listed
  text "5V" at 18.314,34.696 h1 r90
  text "TX" at 10.82,34.629 h1 r90
  text "RX" at 9.32,34.576 h1 r90
  text "PB5" at 13.814,34.103 h1 r90
  text "PB4" at 15.321,34.097 h1 r90
  text "PB9" at 26.316,33.968 h1 r90
  text "PB8" at 30.316,33.966 h1 r90
  text "GND" at 7.82,33.851 h1 r90
  text "GND" at 16.82,33.851 h1 r90
  text "GND" at 22.82,33.851 h1 r90
  text "PC14" at 21.32,33.599 h1 r90
  text "-" at 1.5,31.459 h5
  text "SWCLK" at 32.506,29.68 h1
  text "SWDIO" at 32.788,28.18 h1
  text "GND" at 33.851,26.68 h1
  text "+" at 1.486,26.617 h3
  text "3.3V" at 33.943,25.184 h1
  text "5V" at 34.696,23.686 h1
  text "TX" at 34.629,22.18 h1
  text "RX" at 34.576,20.68 h1
  text "GND" at 33.976,19.18 h1
  text "RX" at 34.576,16.18 h1
  text "TX" at 34.629,14.68 h1
  text "PB15" at 33.606,13.184 h1
  text "PB14" at 33.599,11.678 h1
  text "GND" at 33.851,10.18 h1
  text "5V" at 34.696,8.686 h1
  text "PA4 = SD_CS / PA5 = SD_SCK / PA6 = SD_MISO / PA5 = SD_MOSI" at 16,8.302 h0.8
  text "GND" at 10.18,6.149 h1 r270
  text "GND" at 17.68,6.149 h1 r270
  text "GND" at 23.68,6.149 h1 r270
  text "3.3V" at 25.184,6.057 h1 r270
  text "PB6" at 26.684,5.892 h1 r270
  text "PB0" at 19.184,5.879 h1 r270
  text "PB1" at 20.678,5.777 h1 r270
  text "RX" at 13.18,5.424 h1 r270
  text "TX" at 11.68,5.371 h1 r270
  text "5V" at 8.686,5.304 h1 r270
  text "5V" at 16.186,5.304 h1 r270